# Altium PCB ACCLOGGER.PcbDoc
Units mil, origin at the board's own origin, x right, y up, seen from the top; angles counter-clockwise.
Board outline 1417.32 x 1417.32 mil, 2 copper layers (Top Layer, Bottom Layer), stack 61.2 mil thick; 73 components, 68 nets, 312 pads, 88 vias.
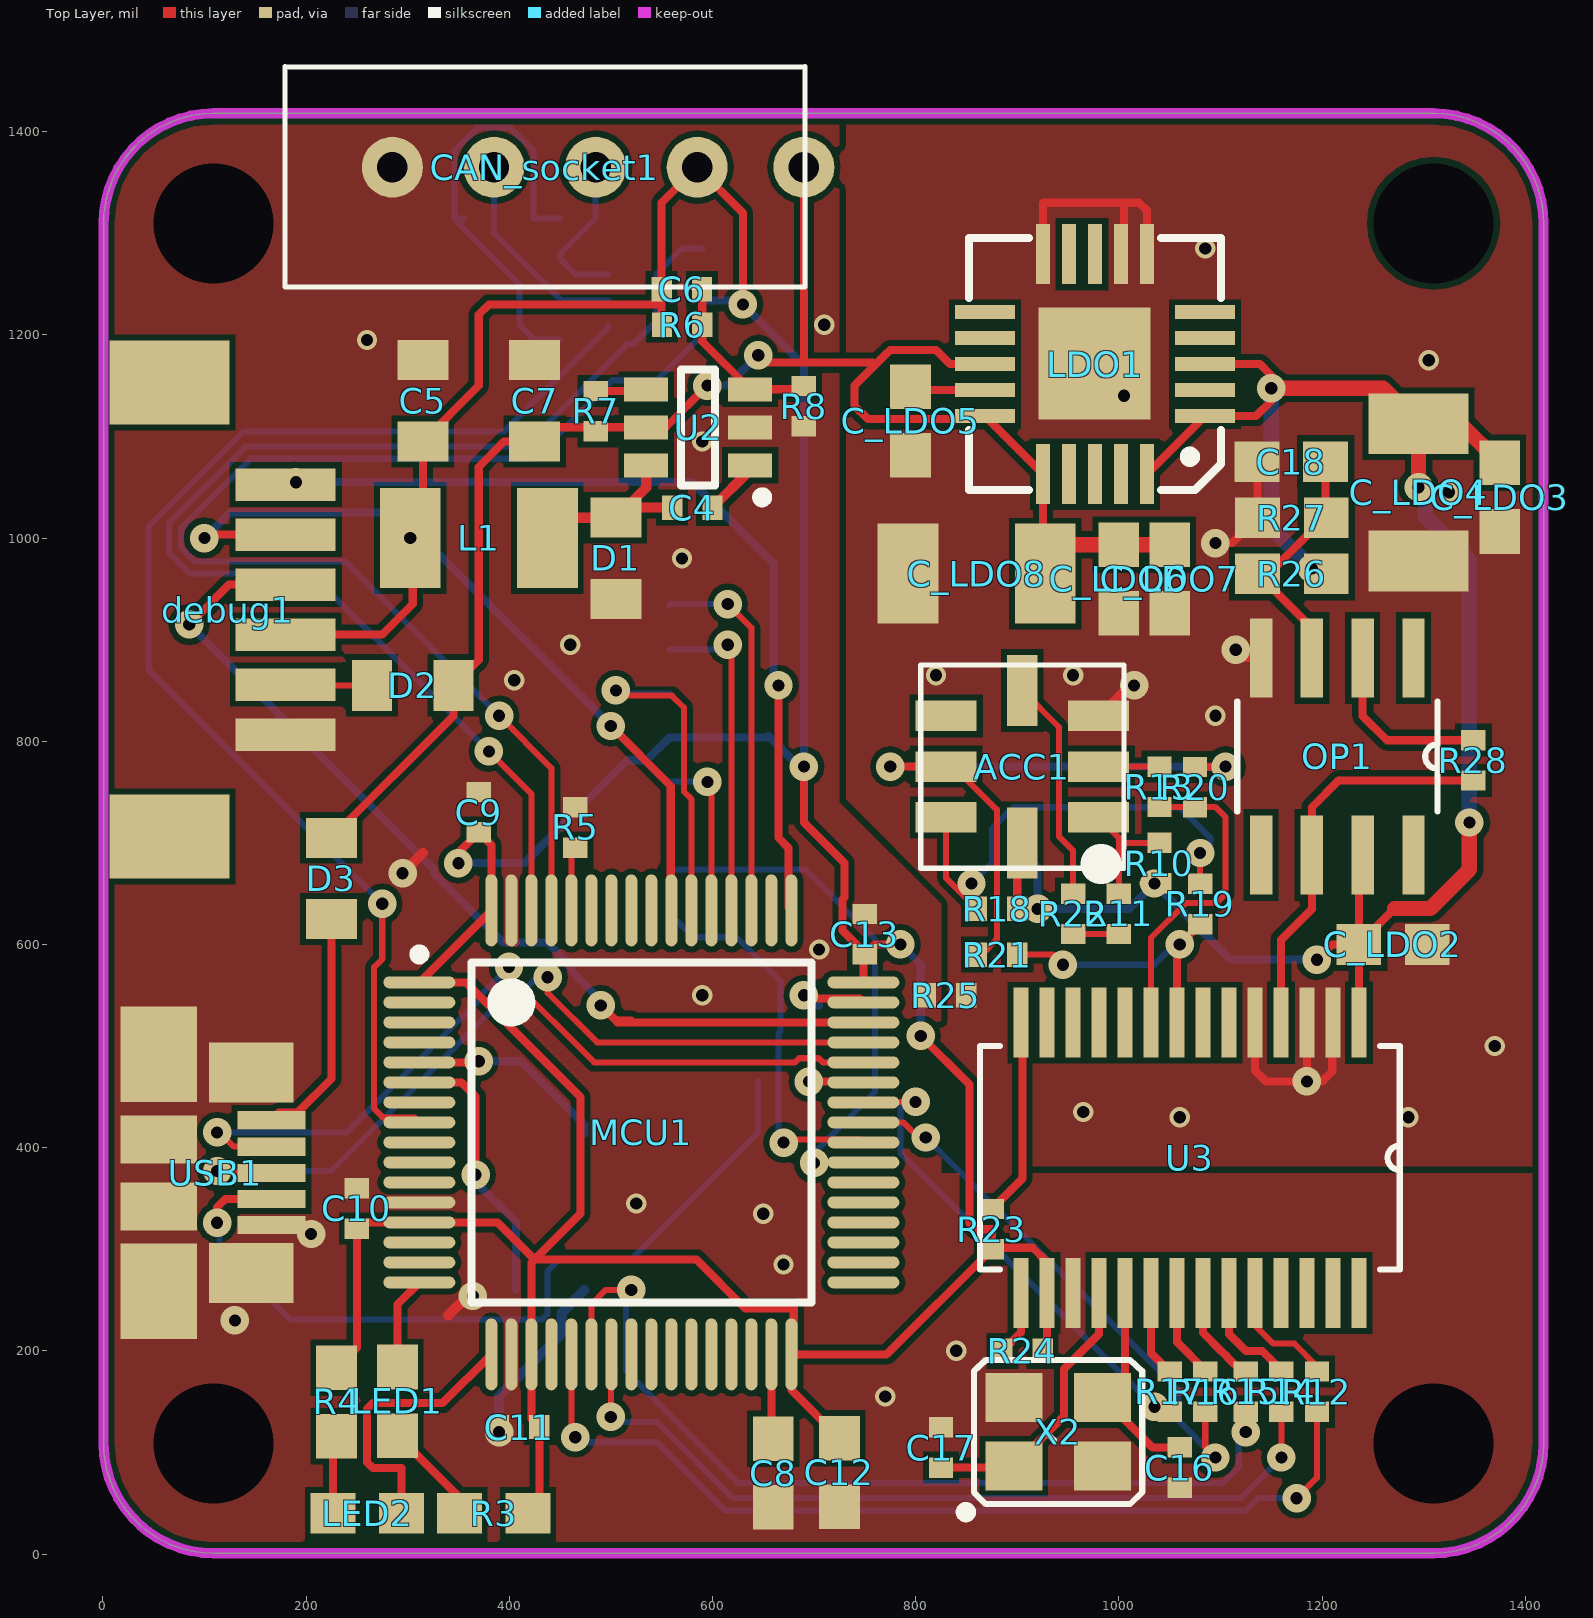
[diagram p0: Top Layer view]
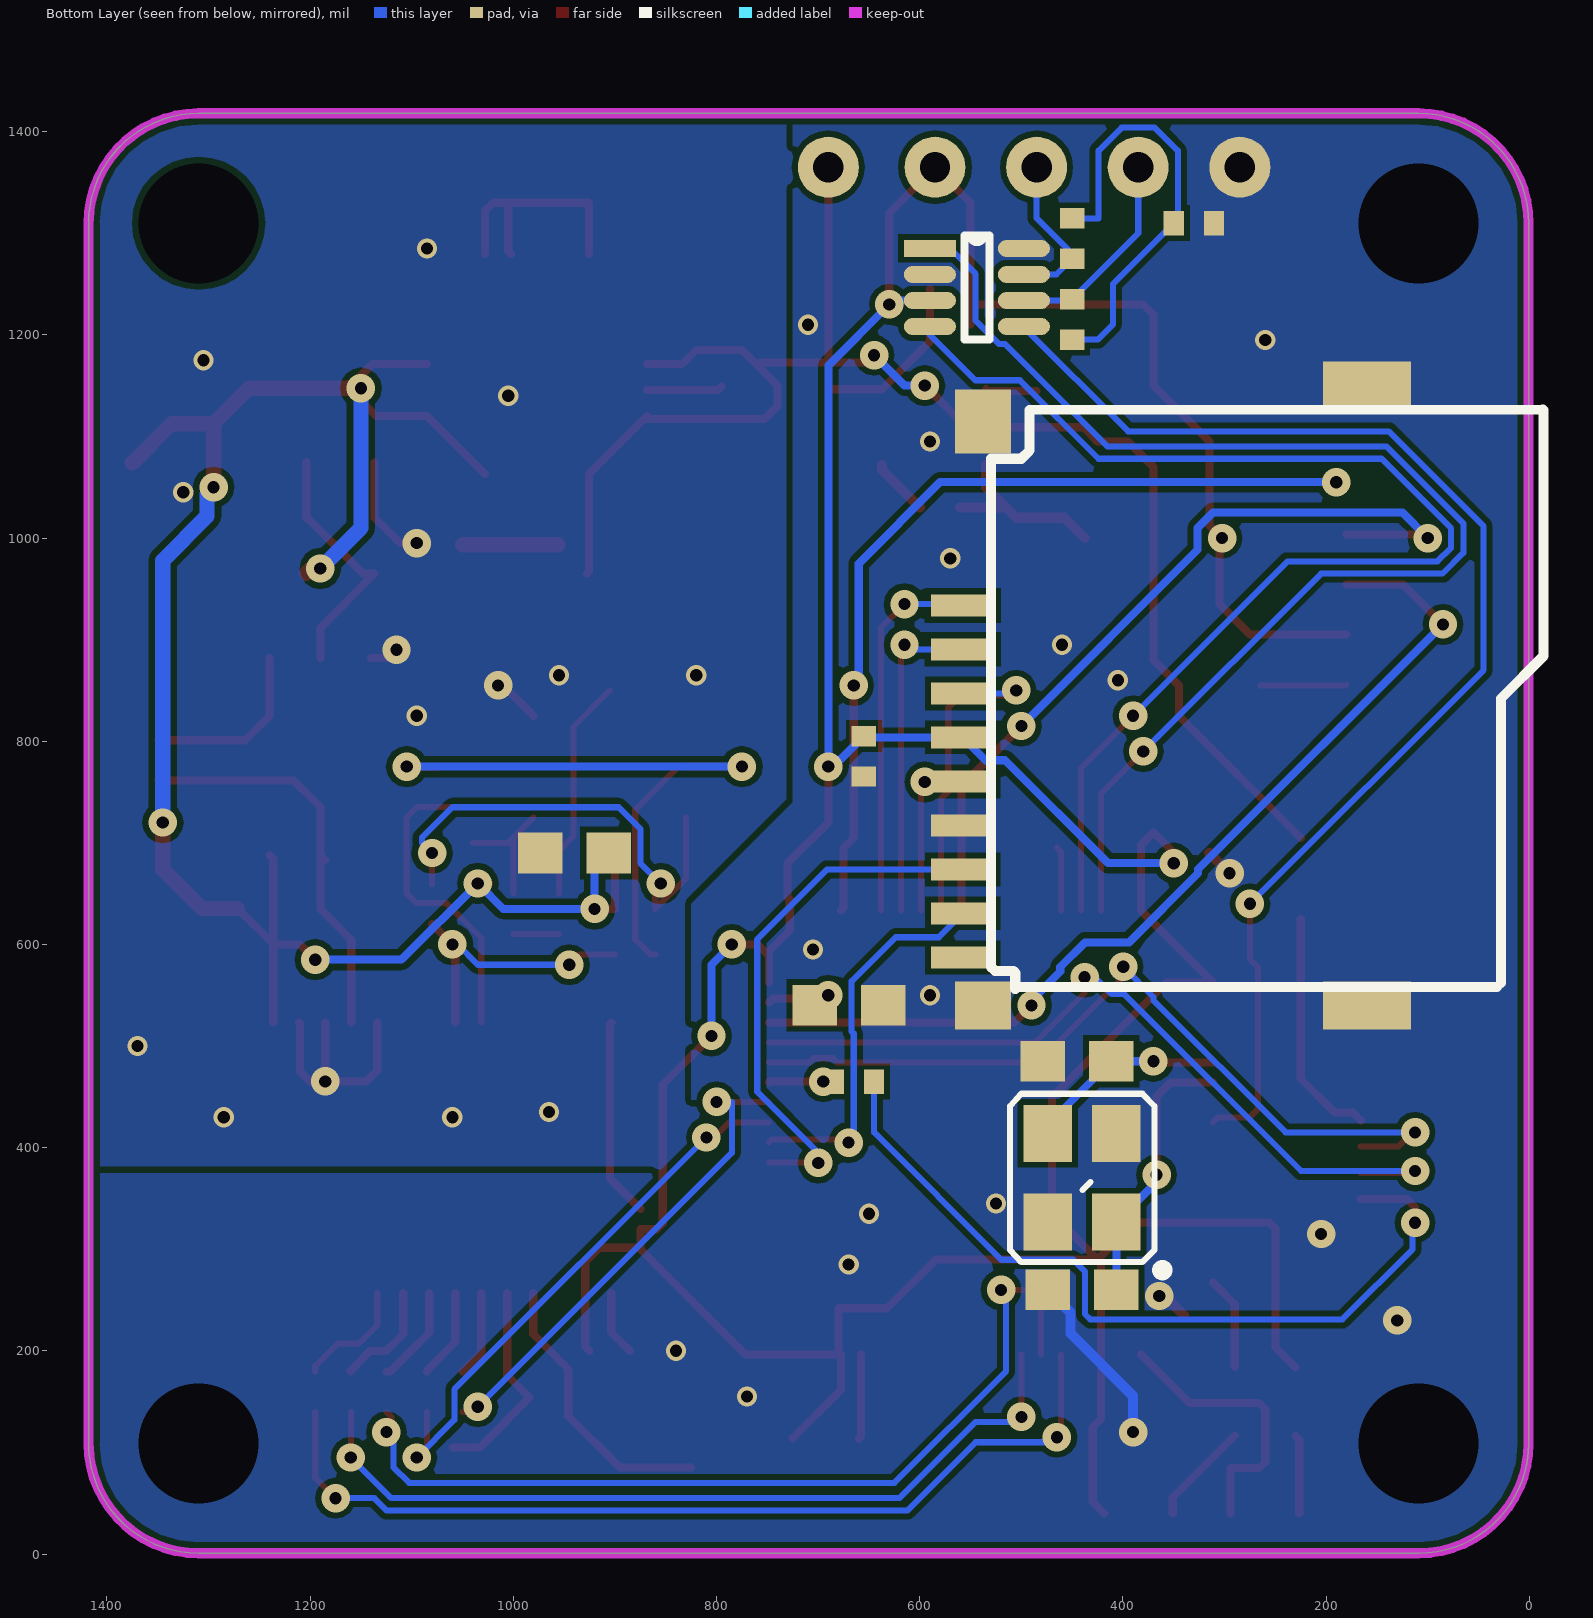
[diagram p1: Bottom Layer view, seen from below]

## Layer stack, top to bottom
Top Solder: solder mask 0.4, Solder Resist, Dk 3.5
Top Layer: signal copper 1.4
Dielectric1: core 58.4, FR-4, Dk 4.8
Bottom Layer: signal copper 1.4
Bottom Solder: solder mask 0.4, Solder Resist, Dk 3.5

## Board outline
0.73,109 ccw(c109,109) 109,0.73 1309.79,0.73 ccw(c1309.79,109) 1418.06,109 1418.06,1309.79 ccw(c1309.79,1309.79) 1309.79,1418.06 109,1418.06 ccw(c109,1309.79) 0.73,1309.79

## Design rules (kind name [scope] priority, off if disabled: settings)
AcuteAngle [All] p1: minimum=6.00000000000000E+0001 checktracksonly=FALSE
Clearance [All] p1: gap=6
ComponentClearance ComponentClearance_servo_headers [InComponent('JP1') or InComponent('JP2') or InComponent('JP3') or InComponent('JP4') or InComponent('JP5') or InComponent('JP6')] p1: gap=5 collisioncheckmode=3 verticalgap=10 showdistances=FALSE
ComponentClearance [All] p2: gap=10 collisioncheckmode=3 verticalgap=10 showdistances=FALSE
DiffPairsRouting [All] p1: maxlimit=20 minlimit=6 mostfreqgap=10 toplayer_minwidth=15 toplayer_maxwidth=15 toplayer_prefwidth=15 bottomlayer_minwidth=15 bottomlayer_maxwidth=15 bottomlayer_prefwidth=15 maxuncoupledlength=500
HoleSize [All] p1: absolutevalues=TRUE maxlimit=1000 minlimit=12 maxpercent=80.000 minpercent=20.000
MinimumAnnularRing [All] p1 off: minimumring=8
MinimumSolderMaskSliver MinimumSolderMaskSliver_FIL1-3 [InComponent('FIL1') or InComponent('FIL2') or InComponent('FIL3')] p1 off: minsoldermaskwidth=1
MinimumSolderMaskSliver [All] p2 off: minsoldermaskwidth=3
PlaneClearance [All] p1: clearance=15
PlaneConnect [All] p1: planeconnectstyle=Direct reliefexpansion=20 reliefentries=4 reliefconductorwidth=10 reliefairgap=10
PolygonConnect PolygonConnect_usb [InComponent('CONN4')] p1: connectstyle=Relief reliefconductorwidth=22 reliefentries=4 polygonreliefangle="90 Angle" airgapwidth=10
PolygonConnect [All] p2: connectstyle=Direct reliefconductorwidth=12 reliefentries=4 polygonreliefangle="90 Angle" airgapwidth=10
RoomDefinition IMU_ACC [InComponentClass('IMU_ACC')] p1 off: confinementstyle=ConfineIn formatcopy=TRUE lockcomponents=FALSE outline -2431,-1944 -431,-1944 -431,-944 -2431,-944
RoomDefinition MCU [InComponentClass('MCU')] p2 off: confinementstyle=ConfineIn formatcopy=TRUE lockcomponents=FALSE outline 1464,61 10779,61 10779,786 1464,786
RoutingVias [All] p1: holewidth=15 width=31 viastyle="Through Hole" minholewidth=12 minwidth=28 maxholewidth=28 maxwidth=50
SilkToSilkClearance SilkToSilkClearance_text [IsText] p1 off: silktosilkclearance=0
SilkToSilkClearance [All] p2 off: silktosilkclearance=4
SilkToSolderMaskClearance SilkscreenOverComponentPads [IsPad] p1 off: minsilkscreentomaskgap=2 clearancetoexposedcopper=TRUE
SolderMaskExpansion [All] p1: expansion=3
UnpouredPolygon [All] p1: allowunpoured=FALSE
Width [All] p1: maxlimit=400 minlimit=6 preferedwidth=10
21 further rules are at their usual default settings.

## Classes and differential pairs
component class MCU: C1 C2 C3 C4 C5 C6 C7 C8 C9 C10 C11 C12 C13 C14 C15 CAN_socket1 D1 D2 D3 debug1 L1 LED1 LED2 MCU1 R1 R2 R3 R4 R5 R6 R7 R8 R9 TF1 U1 U2 USB1 X1
component class IMU_ACC: ACC1 C16 C17 C18 C_LDO1 C_LDO2 C_LDO3 C_LDO4 C_LDO5 C_LDO6 C_LDO7 C_LDO8 LDO1 OP1 R10 R11 R12 R13 R14 R15 R16 R17 R18 R19 R20 R21 R22 R23 R24 R25 R26 R27 R28 U3 X2
differential pair USB: +USB_P -USB_N
differential pair CAN: +CAN_P -CAN_N

## Components (designator, comment, footprint, x,y, rotation, side; value= is the part's Value field where it differs from the comment)
ACC1 "" ADXL203 905,775 r180 top
C1 "" 0402 330,1310 r0 bottom
C2 "" 0603 445,485 r0 bottom
C3 "" 0603 440,260 r0 bottom
C4 "" 0402 580,1030 r0 top
C5 "" 0805 315,1135 r270 top
C6 "" 0402 570,1245 r180 top
C7 "" 0805 425,1135 r270 top
C8 "" 0603 660,80 r270 top
C9 "" 0402 370,730 r90 top
C10 "" 0402 250,340 r90 top
C11 "" 0402 410,125 r180 top
C12 "" 0603 725,80 r90 top
C13 "" 0402 750,610 r90 top
C14 "" 0603 670,540 r180 bottom
C15 "" 0402 655,785 r90 bottom
C16 "" 0402 1060,85 r90 top
C17 "" 0402 825,105 r270 top
C18 "" 0603 1170,1075 r180 top
C_LDO1 "" 0603 940,690 r180 bottom
C_LDO2 "" 0603 1270,600 r180 top
C_LDO3 "" 0603 1375,1040 r90 top
C_LDO4 "" 1210 1295,1045 r90 top
C_LDO5 "" 0603 795,1115 r90 top
C_LDO6 "" 0603 1000,960 r270 top
C_LDO7 "" 0603 1050,960 r270 top
C_LDO8 "" 1210 860,965 r180 top
CAN_socket1 "" 4pSocket-s 435,1365 r180 top
D1 "" 0805 505,980 r90 top
D2 "" 0805 305,855 r0 top
D3 "" 0805 225,665 r90 top
debug1 "" WFRSM125 180,905 r270 top
L1 "" 1210 370,1000 r180 top
LDO1 "" "TPS7A4700 - b" 1075,1120 r180 top
LED1 "" 0603 290,150 r90 top
LED2 "" 0603 260,40 r0 top
MCU1 "" LQFP64_N 530,415 r0 top
OP1 "" D8 1215,785 r270 top
R1 "" 0402 450,1295 r270 bottom
R2 "" 0402 450,1215 r90 bottom
R3 "" 0603 385,40 r180 top
R4 "" 0603 230,150 r270 top
R5 "" 0402 465,715 r90 top
R6 "" 0402 570,1210 r0 top
R7 "" 0402 485,1125 r270 top
R8 "" 0402 690,1130 r270 top
R9 "" 0402 665,465 r180 bottom
R10 "" 0402 1040,680 r90 top
R11 "" 0402 1000,630 r90 top
R12 "" 0402 1195,160 r270 top
R13 "" 0402 1040,755 r90 top
R14 "" 0402 1160,160 r270 top
R15 "" 0402 1125,160 r270 top
R16 "" 0402 1085,160 r270 top
R17 "" 0402 1050,160 r270 top
R18 "" 0402 880,635 r0 top
R19 "" 0402 1080,640 r270 top
R20 "" 0402 1075,755 r270 top
R21 "" 0402 880,590 r0 top
R22 "" 0402 955,630 r90 top
R23 "" 0402 875,320 r270 top
R24 "" 0402 905,200 r0 top
R25 "" 0402 830,550 r180 top
R26 "" 0603 1170,965 r0 top
R27 "" 0603 1170,1020 r0 top
R28 "" 0402 1349,781 r90 top
TF1 "" TF 160,540 r90 bottom
U1 "" SOT-8 590,1285 r180 bottom
U2 "" SOT-23-6L 586,1109 r180 top
U3 "" DB28-L 1070,390 r270 top
USB1 "" MOLEX-47346-0001 55,375 r0 top
X1 "" OSCILLATOR-3.2X2.5 440,370 r90 bottom
X2 "" OSCILLATOR-3.2X2.5 940,120 r0 top

## Footprints (in the part's own frame and the unit in brackets; to place one, negate y for a bottom-side part, rotate by r counter-clockwise, add the part's x,y. Pads: shape width x height; smd on the part's side, far side on the other; paste and mask are expansions set on the pad)
4pSocket-s [mil]
  round 60 hole 30: 1(-150,0) 2(-50,0) 3(50,0) 4(150,0)
  silkscreen extent -256,-99 256,118
0402 [mil] "0402-RES"
  rect 20x24 smd: 1(-19.68,0) 2(20,0)
0603 [mil] "0603-RES"
  rect 44x40 smd: 1(-33.46,0) 2(34,0)
0805 [mil]
  rect 39.37x50 smd: 1(-40,0) 2(40,0)
  body extent -50,-30 50,30, height 31
1210 [mm]
  rect 1.52x2.5 smd: 1(-1.715,0) 2(1.715,0)
ADXL203 [mil]
  rect 60x30 smd: 1(-75,50) 2(-75,0) 3(-75,-50) 5(75,-50) 6(75,0) 7(75,50)
  rect 30x70 smd: 4(0,-75) 8(0,75)
  silkscreen extent -100,-100 100,100, body extent -100,-100 100,100, height 80
D8 [mil]
  rect 78x22 smd: 1(-97,75) 2(-97,25) 3(-97,-25) 4(-97,-75) 5(97,-75) 6(97,-25) 7(97,25) 8(97,75)
  silkscreen extent -54,-99 54,99, body extent -118,-96 118,96, height 64
DB28-L [mil]
  rect 69x15 smd: 1(-133,166.34) 2(-133,140.75) 3(-133,115.16) 4(-133,89.57) 5(-133,63.98) 6(-133,38.39) 7(-133,12.8) 8(-133,-12.8) 9(-133,-38.39) 10(-133,-63.98) 11(-133,-89.57) 12(-133,-115.16) 13(-133,-140.75) 14(-133,-166.34) 15(133,-166.34) 16(133,-140.75) 17(133,-115.16) 18(133,-89.57) 19(133,-63.98) 20(133,-38.39) 21(133,-12.8) 22(133,12.8) 23(133,38.39) 24(133,63.98) 25(133,89.57) 26(133,115.16) 27(133,140.75) 28(133,166.34)
  silkscreen extent -110,-207 110,207
LQFP64_N [mm]
  oval 1.8x0.3 smd: 1(-5.55,3.75) 2(-5.55,3.25) 3(-5.55,2.75) 4(-5.55,2.25) 5(-5.55,1.75) 6(-5.55,1.25) 7(-5.55,0.75) 8(-5.55,0.25) 9(-5.55,-0.25) 10(-5.55,-0.75) 11(-5.55,-1.25) 12(-5.55,-1.75) 13(-5.55,-2.25) 14(-5.55,-2.75) 15(-5.55,-3.25) 16(-5.55,-3.75) 33(5.55,-3.75) 34(5.55,-3.25) 35(5.55,-2.75) 36(5.55,-2.25) 37(5.55,-1.75) 38(5.55,-1.25) 39(5.55,-0.75) 40(5.55,-0.25) 41(5.55,0.25) 42(5.55,0.75) 43(5.55,1.25) 44(5.55,1.75) 45(5.55,2.25) 46(5.55,2.75) 47(5.55,3.25) 48(5.55,3.75)
  oval 0.3x1.8 smd: 17(-3.75,-5.55) 18(-3.25,-5.55) 19(-2.75,-5.55) 20(-2.25,-5.55) 21(-1.75,-5.55) 22(-1.25,-5.55) 23(-0.75,-5.55) 24(-0.25,-5.55) 25(0.25,-5.55) 26(0.75,-5.55) 27(1.25,-5.55) 28(1.75,-5.55) 29(2.25,-5.55) 30(2.75,-5.55) 31(3.25,-5.55) 32(3.75,-5.55) 49(3.75,5.55) 50(3.25,5.55) 51(2.75,5.55) 52(2.25,5.55) 53(1.75,5.55) 54(1.25,5.55) 55(0.75,5.55) 56(0.25,5.55) 57(-0.25,5.55) 58(-0.75,5.55) 59(-1.25,5.55) 60(-1.75,5.55) 61(-2.25,5.55) 62(-2.75,5.55) 63(-3.25,5.55) 64(-3.75,5.55)
  silkscreen extent -5.67,-4.25 4.25,4.57
MOLEX-47346-0001 [mil] "MOLEX-47346-0001"
  rect 67x18 smd: 1(111,52) 2(111,26) 3(111,0) 4(111,-25.59) 5(111,-51.18)
  rect 75x94 smd: 5(0,-116.14) 5(0,117)
  rect 75x47 smd: 5(0,-32.97) 5(0,33)
  rect 83x59 smd: 5(91,-98.43) 5(91,99)
OSCILLATOR-3.2X2.5 [mil] "OSCILLATOR-3.2X2.5"
  rect 56x48 smd: 1(-43.31,-33.46) 2(44,-33.46) 3(44,34) 4(-43.31,34)
  silkscreen extent -95,-83 83,71
SOT-8 [mm]
  rect 1.3x0.42 smd: 1(0,0)
  oval 1.3x0.42 smd: 2(0,-0.65) 3(0,-1.3) 4(0,-1.95) 5(2.35,-1.95) 6(2.35,-1.3) 7(2.35,-0.65) 8(2.35,0)
  silkscreen extent 0.87,-2.28 1.48,0.33
SOT-23-6L [mm]
  rect 1.1x0.6 smd: 1(-1.3,0.95) 2(-1.3,0) 3(-1.3,-0.95) 4(1.3,-0.95) 5(1.3,0) 6(1.3,0.95)
  silkscreen extent -1.73,-1.45 0.43,1.87
TF [mm]
  rect 0.55x1.6 smd: 1(10,10.1) 2(8.9,10.1) 3(7.8,10.1) 4(6.7,10.1) 5(5.6,10.1) 6(4.5,10.1) 7(3.4,10.1) 8(2.3,10.1) 9(1.2,10.1)
  rect 1.2x2.2 smd: SHELL(0,0) SHELL(15.5,0)
  rect 1.2x1.4 smd: SHELL(0,9.6)
  rect 1.6x1.4 smd: SHELL(14.6,9.6)
  silkscreen extent 0.41,-4.42 14.9,9.4
"TPS7A4700 - b" [mm]
  rect 2.8x2.8 smd: 0(2.515,-1.321)
  rect 1.5x0.35 smd: 1(-0.25,0) 2(-0.25,-0.65) 3(-0.25,-1.3) 4(-0.25,-1.95) 5(-0.25,-2.6) 11(5.25,-2.6) 12(5.25,-1.95) 13(5.25,-1.3) 14(5.25,-0.65) 15(5.25,0)
  rect 0.35x1.5 smd: 6(1.2,-4.05) 7(1.85,-4.05) 8(2.5,-4.05) 9(3.15,-4.05) 10(3.8,-4.05) 16(3.8,1.45) 17(3.15,1.45) 18(2.5,1.45) 19(1.85,1.45) 20(1.2,1.45)
  silkscreen extent -0.65,-4.45 5.65,1.85
WFRSM125 [mm]
  rect 0.81x2.5 smd: 1(-3.75,0) 2(-2.5,0) 3(-1.25,0) 4(0,0) 5(1.25,0) 6(2.5,0)
  rect 2.1x3 smd: shell(-6.3,-2.9) shell(5.05,-2.9)
  body extent -6.79,-3.82 5.46,0.38, height 3.4

## Part data
ACC1: library part ACC-8, "Imported"
C1 C2 C3 C4 C5 C6 C7 C8 C9 C10 C11 C12 C13 C14 C15 C16 C17 C18: library part CAP0402-CAP, "电容"
C_LDO1 C_LDO2 C_LDO3 C_LDO5 C_LDO6 C_LDO7 C_LDO8: library part Cap, "Capacitor"
C_LDO4: library part Cap2, "Capacitor"
CAN_socket1: library part 4PSocket
D1 D2 D3: library part Diode, "Default Diode"
debug1: library part debug
L1: library part Inductor, "Inductor"
LDO1: library part TPS7A4700
LED1 LED2: library part LED0, "Typical INFRARED GaAs LED"
MCU1: library part STM32F103R8T6, "STM32 ARM-based 32-bit MCU with 64 Kbytes Flash, 64-pin LQFP, Industrial Temperature"
OP1: library part OP-SO8
R1 R2 R3 R4 R5 R6 R7 R8 R9: library part Res2, "电阻"
R10 R11 R12 R13 R14 R15 R16 R17 R18 R19 R20 R21 R22 R23 R24 R25 R26 R27 R28: library part Res2, "Resistor"
TF1: library part TF
U1: library part MAX3051
U2: library part MP2451
U3: library part ADS1256_DB_28, "Imported"
USB1: library part USB_Micro_TypeB, "Connector SMD USB Micro Type B middle mount"
X1 X2: library part OSCILLATOR-3.2X2.5, "Crystal Oscillator in 3.2x2.5 SMD"

## Free pads (board coordinates)
  round 0 hole 118.11 unplated: 0(109,109) 0(109,1309.79) 0(1309.79,109) 0(1309.79,1309.79)
  round 60 hole 30: 0(690,1365)

## Via types
v1: diameter 28, hole 12, Top Layer to Bottom Layer, 64 vias
v2: diameter 20, hole 12, Top Layer to Bottom Layer, 24 vias

## Nets (pads, with @x,y where several pads share a name; then routed paths per layer and width w, separated by ;. In a path a pad name is that pad's centre, name@x,y a point inside that pad or via, vN(x,y) a via of type N, cw(c..) or ccw(c..) an arc to the next point about the centre after c; other vN are vias at no path point)
3.3: C5.2 C6.2 C9.1 C10.1 C11.1 C12.2 C13.1 C15.2 CAN_socket1.1 debug1.4 L1.2 MCU1.1 MCU1.13 MCU1.19 MCU1.32 MCU1.48 MCU1.64 R3.1 R4.1 R6.1 R23.2 R24.2 TF1.4 U1.3 U3.16 | length 4525
  Top Layer w8: debug1.4 275,905 305,935 305,997.48 v1(302.48,1000) 315,1012.52 C5.2 370,1150 370,1220 380,1230 550,1230 ; R4.1 250,203.46 C10.1 256.1,326.42 MCU1.13 388.58,326.42 425,290 ; v1(350,680) 350,690.32 C9.1 382.36,697.95 MCU1.64 MCU1.1 357.36,562.64 470,450 470,335 425,290 ; R3.1 429.68,51.22 C11.1 421.73,132.95 MCU1.19 421.73,286.73 425,290 ; R6.1 550,1210.32 550,1230 ; v1(630,1230) 630,1320 CAN_socket1.1 550,1330 C6.2 550,1230 ; v1(690,775) 690,720 730,680 730,646.14 728,644.14 728,613.86 750,591.86 C13.1 ; C12.2 677.64,161.36 MCU1.32 ; MCU1.48 748.5,588.82 C13.1 ; v1(785,600) 759.68,600 C13.1 ; v1(805,510) 853,462 853,325.54 858.86,319.68 875,319.68 R23.2 ; R24.2 929.25,204.25 U3.16 929.25,287.55 915.3,301.5 876.5,301.5 R23.2 ; 425,290 584.13,290 632.2,241.93 680,241.93 680,198.86 MCU1.32 ; MCU1.32 771.5,196.5 R23.2
  Bottom Layer w8: v1(350,680) 414.84,680 516.14,781.3 535.16,781.3 TF1.4 653.78,803.78 C15.2 685,775 v1(690,775) 690,1170 v1(630,1230) 626.18,1233.82 U1.3 ; v1(785,600) 805,580 v1(805,510)
5V: ACC1.8 C_LDO1.2 C_LDO2.2 C_LDO3.2 C_LDO4.2 LDO1.1 LDO1.3 LDO1.20 OP1.7 R10.1 R18.2 R26.2 U3.1 | length 2108.2
  Top Layer w8: ACC1.8 900,695 R18.2 v1(920,635) ; LDO1.20 LDO1.1 1135,1120 1150,1135 v1(1150,1147.5) 1150,1160 1138.82,1171.18 LDO1.3 ; v1(1035,660) 1024,660 1024,660.32 R10.1 ; v1(1195,585) 1210,600 C_LDO2.2 C_LDO2.2@1236.34,600.34 ; U3.1 C_LDO2.2@1236.34,600.34 ; OP1.7 1236.34,684.34 C_LDO2.2@1236.34,600.34 ; 1345,678.86 1305.14,639 1275,639 1271.5,635.5 C_LDO2.2@1236.34,600.34
  Top Layer w15: v1(1150,1147.5) 1260.02,1147.5 C_LDO4.2 ; v1(1190,970) 1199,970 R26.2 ; 1271.5,635.5 1306.59,635.5 1345,673.91 1345,678.86 v1(1345,720) ; v1(1295,1050) C_LDO4.2 ; C_LDO3.2 1336.48,1112.52 C_LDO4.2
  Bottom Layer w8: C_LDO1.2 920,676 v1(920,635) 1010,635 v1(1035,660) 1110,585 v1(1195,585)
  Bottom Layer w15: v1(1150,1147.5) 1150,1010 v1(1190,970) ; v1(1295,1050) 1301.5,1043.5 1301.5,1021.5 1345,978 v1(1345,720)
AGND: ACC1.3 C18.2 C_LDO1.1 C_LDO2.1 C_LDO3.1 C_LDO4.1 C_LDO5.1 C_LDO6.2 C_LDO7.2 C_LDO8.2 LDO1.0 LDO1.6 LDO1.7 LDO1.10 OP1.4 R25.1 R27.1 U3.2 U3.3 U3.5 | length 670.8
  Top Layer w8: LDO1.10 925.39,1330 1005,1330 ; ACC1.3 984.61,829.61 1010,855 v1(1015,855) ; LDO1.7 1005,1282.28 1005,1330 ; LDO1.6 1027.76,1322.24 1020,1330 1005,1330 ; v1(1095,995) 1111.54,995 1132.09,1015.55 R27.1 C18.2@1136.54,1074.46 ; v1(1115,890) 1123,882 OP1.4 ; U3.5 1133.98,476.02 1145,465 v1@1185,465 ; U3.3 v1(1185.16,465.16) v1@1185,465 ; U3.2 1210,522.25 1210,475 1200,465 v1@1185,465
  other v2: 1060,430 1285,430 965,435 1370,500 1095,825 820,865 955,865 1325,1045 1005,1140 1305,1175 1085,1285
AX: R19.2 R21.2 U3.8 | length 278.9
  Top Layer w6: R21.2 935,590 v1(945,580)
  Top Layer w8: U3.8 1057.2,597.2 v1(1060,600) R19.2
  Bottom Layer w6: v1(945,580) 1035,580 1055,600 v1(1060,600)
AY: R13.1 R20.2 U3.9 | length 319.6
  Top Layer w6: U3.9 1031.61,606.34 1065.96,640.68 1095.73,640.68 1105,649.96 1105,725 1094.68,735.32 R20.2@1074.68,735.32 ; R13.1 R20.2@1074.68,735.32 ; R20.2 R20.2@1074.68,735.32
CAN_N: CAN_socket1.3 R2.2 U1.6 | length 204.9
  Bottom Layer w6: CAN_socket1.3 385,1300 R2.2 451.18,1233.82 U1.6
CAN_P: CAN_socket1.2 R1.2 U1.7 | length 158.4
  Bottom Layer w6: CAN_socket1.2 485,1314.96 450,1279.96 R1.2 465.59,1259.41 U1.7
GND: C1.1 C2.2 C3.2 C5.1 C7.1 C8.2 C9.2 C10.2 C11.2 C12.1 C13.2 C14.2 C15.1 C16.1 C17.1 CAN_socket1.4 D1.1 debug1.6 MCU1.12 MCU1.18 MCU1.63 pad.0@109,109 pad.0@109,1309.79 pad.0@1309.79,109 R5.2 R8.2 R25.2 TF1.6 TF1.SHELL U1.2 U1.8 U2.2 U3.17 USB1.5 X1.2 X1.4 X2.2 X2.4 | length 235.2
  Top Layer w10: v1(295,670) 315,690 ; 340,235 359,254 v1(364.3,254)
  Bottom Layer w10: v1(390,120) 390,155.46 451.54,217 451.54,237.54 C3.2
  other v1: 130,230 205,315
  other v2: 770,155 840,200 670,285 650,335 525,345 590,550 705,595 405,860 460,895 570,980 590,1095 260,1195 710,1210
NetACC1_1: ACC1.1 R10.2 R11.2 | length 125.4
  Top Layer w6: ACC1.1 1000,705 ; R11.2 1000,705 ; R10.2 1005,700 1000,705
NetACC1_2: ACC1.2 R13.2 | length 60
  Top Layer w6: ACC1.2 R13.2
NetACC1_4: ACC1.4 R22.2 | length 220.7
  Top Layer w6: ACC1.4 941,814 941,706.27 955,692.27 R22.2
NetACC1_6: ACC1.6 R20.1 R21.1 | length 636.3
  Top Layer w6: ACC1.6 837.73,775 880,732.73 880,605 865,590 R21.1
  Top Layer w8: v1(775,775) ACC1.6 ; R20.1 1104.68,774.68 v1(1105,775)
  Bottom Layer w8: v1(775,775) v1(1105,775)
NetACC1_7: ACC1.7 R18.1 R19.1 | length 477.5
  Top Layer w6: ACC1.7 830,665.32 R18.1 860.32,654.68 v1(855,660) ; R19.1 v1(1080,690)
  Bottom Layer w6: v1(855,660) 875,680 875,713.73 896.27,735 1060,735 1090,705 1090,700 v1(1080,690)
NetC1_2: C1.2 R1.1 R2.1 | length 442.1
  Bottom Layer w6: R2.1 424.68,1195.32 410,1210 410,1250 C1.2 354.68,1314.68 346,1314.68 346,1381.15 368.85,1404 401.15,1404 424,1381.15 424,1314.68 R1.1
NetC2_1: C2.1 MCU1.5 X1.3 | length 197.4
  Top Layer w8: MCU1.5 368.9,483.9 v1(370,485)
  Bottom Layer w8: v1(370,485) C2.1 474,422.54 X1.3
NetC3_1: C3.1 MCU1.6 X1.1 | length 273.4
  Top Layer w8: MCU1.6 353.16,464.21 366.93,450.45 v1(366.93,373.32)
  Bottom Layer w8: v1(366.93,373.32) 365,375.25 365,368.23 X1.1 C3.1
NetC4_1: C4.1 D1.2 L1.1 U2.6 | length 185
  Top Layer w10: L1.1 457.52,1020 D1.2 D1.2@515,1030 ; U2.6 534.82,1049.82 D1.2@515,1030 ; C4.1 D1.2@515,1030
NetC4_2: C4.2 U2.1 | length 57
  Top Layer w10: C4.2 637.18,1067.18 U2.1
NetC6_1: C6.1 R6.2 R8.1 U2.3 | length 172.5
  Top Layer w8: C6.1 590,1244.68 R6.2 590,1193.58 U2.3 686.71,1146.4 R8.1
NetC8_1: C8.1 MCU1.31 | length 83.9
  Top Layer w8: MCU1.31 657.95,115.51 C8.1
NetC14_1: C14.1 MCU1.47 | length 82.1
  Top Layer w8: v1(690,550) 693.27,546.73 744.72,546.73 MCU1.47
  Bottom Layer w8: v1(690,550) 695,550 705,540 C14.1
NetC16_2: C16.2 U3.19 X2.3 | length 208.4
  Top Layer w8: U3.19 1006.02,176.02 X2.3 1033,105 C16.2
NetC17_2: C17.2 U3.18 X2.1 | length 277.5
  Top Layer w8: C17.2 895.16,85 X2.1 946,135.84 946,182.14 980.43,216.58 U3.18
NetC18_1: C18.1 OP1.3 R26.1 R27.2 | length 250.3
  Top Layer w8: OP1.3 1190,911.54 R26.1 1147.93,965 1172,989.07 1172,989.14 1177.86,995 1177.93,995 R27.2@1203.46,1020.54 ; C18.1 R27.2@1203.46,1020.54 ; R27.2 R27.2@1203.46,1020.54
NetC_LDO5_2: C_LDO5.2 LDO1.14 | length 74.7
  Top Layer w8: C_LDO5.2 798.41,1145.59 LDO1.14
NetD2_1: D2.1 debug1.5 | length 85.3
  Top Layer w6: debug1.5 180.79,855 D2.1
NetD3_1: D3.1 USB1.1 | length 233.1
  Top Layer w8: USB1.1 173.5,434.5 191.64,434.5 225,467.86 D3.1
Netdebug1_1: debug1.1 MCU1.49 | length 862.9
  Top Layer w8: debug1.1 187.64,1052.64 v1(190,1055) ; v1(665,855) 665,705 675,695 675,636.14 MCU1.49
  Bottom Layer w8: v1(190,1055) 580,1055 660,975 660,860 v1(665,855)
Netdebug1_2: debug1.2 MCU1.55 | length 797.5
  Top Layer w8: v1(100,1000) 103.43,1003.43 debug1.2 ; v1(500,815) 559,756 559,634.03 MCU1.55
  Bottom Layer w8: v1(100,1000) 125,1025 311.42,1025 326.48,1009.94 326.48,988.52 v1(500,815)
Netdebug1_3: debug1.3 MCU1.46 | length 967
  Top Layer w8: v1(85,915) 124.21,954.21 debug1.3 ; v1(490,540) 505,525 ; 520,525 505,525 ; MCU1.46 506.73,523.27 505,525
  Bottom Layer w8: v1(85,915) 326,674 326,670.06 393.99,602.07 437.43,602.07 461.78,577.72 461.78,573.22 495,540 v1(490,540)
NetLED1_1: LED1.1 R3.2 | length 101.8
  Top Layer w8: LED1.1 351,55.54 R3.2
NetLED1_2: LED1.2 MCU1.16 | length 92.3
  Top Layer w8: LED1.2 290,245.87 MCU1.16
NetLED2_1: LED2.1 R4.2 | length 77.4
  Top Layer w8: LED2.1 226.54,112.54 R4.2
NetLED2_2: LED2.2 MCU1.17 | length 277.9
  Top Layer w8: LED2.2 294,84.54 265.86,84.54 260,90.39 260,142.68 265.86,148.54 334.4,148.54 MCU1.17
NetMCU1_8: MCU1.8 U1.5 | length 1256.1
  Top Layer w6: v1(275,640) 275,585.48 267.06,577.54 267.06,438.35 275.79,429.62 306.72,429.62 MCU1.8
  Bottom Layer w6: v1(275,640) 45,870 45,1011.47 138.53,1105 395,1105 497.48,1207.48 U1.5
NetMCU1_14: MCU1.14
NetMCU1_21: MCU1.21 R12.2 | length 921.2
  Top Layer w6: MCU1.21 461.1,118.9 v1(465,115) ; v1(1175,55) 1195,75 R12.2
  Bottom Layer w6: v1(465,115) 470,110 545,110 612,43 1124.97,43 1136.97,55 v1(1175,55)
NetMCU1_22: MCU1.22 R15.2 | length 893.7
  Top Layer w6: MCU1.22 480.79,244.21 480,245 495,260 v1(520,260) ; v1(1125,120) 1120,125 1120,135 R15.2
  Bottom Layer w6: v1(520,260) 515,255 515,180 625,70 1102.53,70 1118,85.47 1118,113 v1(1125,120)
NetMCU1_23: MCU1.23 R14.2 | length 816.4
  Top Layer w6: v1(500,135) 500,196.02 MCU1.23 ; v1(1160,95) R14.2
  Bottom Layer w6: v1(500,135) 505,130 545,130 620,55 1120,55 v1(1160,95)
NetMCU1_39: MCU1.39 TF1.7 | length 524.4
  Top Layer w6: v1(700,385) 700.47,385.47 MCU1.39
  Bottom Layer w6: TF1.7 691.14,673.86 760,605 760,455 700,395 v1(700,385)
NetMCU1_40: MCU1.40 TF1.8 | length 377.5
  Top Layer w6: v1(670,405) 673,408 745.66,408 MCU1.40
  Bottom Layer w6: TF1.8 581.12,607.07 623.66,607.07 667,563.73 667,514.27 665,512.27 v1@665,405
NetMCU1_41: MCU1.41 R16.2 | length 549.8
  Top Layer w6: MCU1.41 787.63,424.84 802.47,410 v1(810,410) ; R16.2 1085,105 v1(1095,95)
  Bottom Layer w6: v1(810,410) 1058,162 1058,132 v1(1095,95)
NetMCU1_42: MCU1.42 R17.2 | length 490.2
  Top Layer w6: MCU1.42 748.98,445 v1(800,445) ; v1(1035,145) 1035,140 R17.2
  Bottom Layer w6: v1(800,445) 785,445 785,395 v1(1035,145)
NetMCU1_43: MCU1.43 R9.1 | length 64.1
  Top Layer w8: v1(695,465) 747.72,465 MCU1.43
  Bottom Layer w8: R9.1 v1(695,465)
NetMCU1_51: MCU1.51 TF1.1 | length 369
  Top Layer w6: v1(615,935) 638.27,911.73 MCU1.51
  Bottom Layer w6: TF1.1 558.94,935 v1(615,935)
NetMCU1_52: MCU1.52 TF1.2 | length 322.2
  Top Layer w6: v1(615,895) 618.58,891.42 MCU1.52
  Bottom Layer w6: TF1.2 610.39,890.39 v1(615,895)
NetMCU1_53: MCU1.53 TF1.5 | length 165.7
  Top Layer w6: v1(595,760) 598.9,756.1 MCU1.53
  Bottom Layer w6: TF1.5 594.53,760.47 v1(595,760)
NetMCU1_54: MCU1.54 TF1.3 | length 330.4
  Top Layer w6: v1(505,850) 510,845 560,845 572,833 572,750.47 579.21,743.26 MCU1.54
  Bottom Layer w6: v1(505,850) 507.91,847.09 TF1.3
NetMCU1_58: MCU1.58
NetMCU1_59: MCU1.59
NetMCU1_60: MCU1.60 R5.1 | length 63.4
  Top Layer w6: MCU1.60 461.1,691.42 R5.1
NetMCU1_61: MCU1.61 U1.4 | length 1213.5
  Top Layer w6: v1(390,825) 441.42,773.58 MCU1.61
  Bottom Layer w6: v1(390,825) 238,977 90.47,977 77,990.47 77,1009.53 145.47,1078 424.09,1078 501.39,1155.3 545.3,1155.3 590,1200 U1.4
NetMCU1_62: MCU1.62 U1.1 | length 1262.7
  Top Layer w6: v1(380,790) 421.73,748.27 MCU1.62
  Bottom Layer w6: v1(380,790) 205,965 85.5,965 65,985.5 65,1014.5 140.5,1090 415,1090 515.96,1190.96 521.96,1190.96 545,1214 545,1260 570,1285 U1.1
NetOP1_2: OP1.2 R28.2 | length 175.9
  Top Layer w8: OP1.2 1240,825 1264,801 R28.2
NetR7_1: R7.1 U2.4 | length 50.5
  Top Layer w8: R7.1 533.1,1144.68 U2.4
NetR9_2: R9.2 USB1.4 | length 808.6
  Top Layer w8: v1(112.5,326.07) 112.5,341.32 115,343.82 120.59,349.41 USB1.4
  Bottom Layer w6: v1(112.5,326.07) 115,323.57 115,300 184,231 432.26,231 437.54,236.27 437.54,278.26 448.96,289.69 519.69,289.69 645,415 R9.2
NetR12_1: R12.1 U3.24 | length 114.8
  Top Layer w6: U3.24 1133.98,225.24 1152.11,207.11 1172.89,207.11 1195,185 R12.1
NetR14_1: R14.1 U3.23 | length 108
  Top Layer w8: U3.23 1108.39,216.61 1125.32,199.68 1141.14,199.68 1160,180.83 R14.1
NetR15_1: R15.1 U3.22 | length 97.3
  Top Layer w8: U3.22 1082.8,217.83 1100.63,200 1100.83,200 1107,193.83 1107,193.63 1120.94,179.68 R15.1
NetR16_1: R16.1 U3.21 | length 88.8
  Top Layer w8: U3.21 1057.2,208.62 1085,180.83 R16.1
NetR17_1: R17.1 U3.20 | length 84.9
  Top Layer w8: U3.20 1031.61,198.07 R17.1
NetR23_1: R23.1 U3.14 | length 196.3
  Top Layer w8: R23.1 905,369.68 905,521.66 U3.14
NetR24_1: R24.1 U3.15 | length 64.6
  Top Layer w8: R24.1 903.66,218.35 U3.15
REFP: OP1.6 R28.1 U3.4 | length 401.4
  Top Layer w8: U3.4 1159.57,604.57 1190,635 OP1.6 ; OP1.6@1185.16,683.16 OP1.6 ; R28.1 1216.32,761.32 1190,735 OP1.6
ST: R11.1 R22.1 | length 45
  Top Layer w6: R22.1 R11.1
USB_N: MCU1.44 USB1.2 | length 813.3
  Top Layer w6: v1(112.5,415) 115,415 129,401 USB1.2 ; v1(399.78,578.07) 399.78,567.59 483.47,483.9 681.37,483.9 685.47,488 704.53,488 708.63,483.9 MCU1.44
  Bottom Layer w6: v1(112.5,415) 240,415 370,545 370,548.29 v1(399.78,578.07)
USB_P: MCU1.45 USB1.3 | length 805.1
  Top Layer w6: v1(112.5,377) 114.5,375 USB1.3 ; v1(437.78,567.78) 437.78,552.22 486.42,503.58 MCU1.45
  Bottom Layer w6: v1(112.5,377) 224.63,377 398.7,551.07 410.96,551.07 427.67,567.78 v1(437.78,567.78)
VMCU: C7.2 C_LDO6.1 C_LDO7.1 C_LDO8.1 D2.2 D3.2 LDO1.13 LDO1.15 LDO1.16 pad.0@690,1365 R7.2 U2.5 | length 1632.5
  Top Layer w8: D3.2 345,825 D2.2 370,880 370,1070 395,1095 C7.2 439,1109 U2.5 554,1109 v1(595,1150) ; v1(645,1180) 652.4,1172.6 690,1172.6 ; pad.0@690,1365 690,1172.6 ; 757.54,1172.6 690,1172.6 ; LDO1.13 833.82,1171.18 820,1185 775,1185 771,1181 770.86,1181 740,1150.14 740,1130 753,1117 868.31,1117 LDO1.15 LDO1.16 925.39,967.13 C_LDO8.1
  Top Layer w15: C_LDO8.1@955.98,993.46 C_LDO6.1 C_LDO7.1
  Bottom Layer w8: v1(595,1150) 615,1150 v1(645,1180)
pads on no net: ACC1.5 debug1.shell LDO1.2 LDO1.4 LDO1.5 LDO1.8 LDO1.9 LDO1.11 LDO1.12 LDO1.17 LDO1.18 LDO1.19 MCU1.2 MCU1.3 MCU1.4 MCU1.7 MCU1.9 MCU1.10 MCU1.11 MCU1.15 MCU1.20 MCU1.24 MCU1.25 MCU1.26 MCU1.27 MCU1.28 MCU1.29 MCU1.30 MCU1.33 MCU1.34 MCU1.35 MCU1.36 MCU1.37 MCU1.38 MCU1.50 MCU1.56 MCU1.57 OP1.1 OP1.5 OP1.8 TF1.9 U3.6 U3.7 U3.10 U3.11 U3.12 U3.13 U3.25 U3.26 U3.27 U3.28

## Polygon pours and split planes (outlines as drawn)
GND on Bottom Layer "Top Layer-No Net" (solid, remove dead copper, pour order 6): -90,1555 -60,1525 -60,-200 1610,-200 1615,-205 1575,-165 1575,375 825,375 825,600 825,640 725,740 725,1605
AGND on Bottom Layer "Top Layer-No Net" (solid, remove dead copper, pour order 7): 695,1505 695,280 1580,280 1580,1440 1550,1470
GND on Top Layer "Top Layer-No Net" (solid, remove dead copper, pour order 5): -90,1555 -60,1525 -60,-200 1610,-200 1615,-205 1575,-165 1575,375 825,375 825,600 825,640 725,740 725,1605
AGND on Top Layer "Top Layer-No Net" (solid, remove dead copper, pour order 8): 645,1525 680,1490 680,310 1430,310 1455,335 1525,405 1525,1525

## Keep-outs
Keep-Out Layer:
  the board outline again, w10

## Silkscreen, mask and mechanical layers (free items; w line width, h text height)
Mechanical 1:
  the board outline again, w10

## Dimensions
0.73,-18.95 to 1418.06,-28.79 on Dimensions
109,-18.95 to 1309.79,-18.95 on Dimensions
-18.95,109 to -18.95,1309.79 on Dimensions
-18.95,0.73 to -18.95,1418.06 on Dimensions

## Text inside footprints (layer, text, board x,y; h text height)
U2: Mechanical 15 "1" at 568.28,1115.47 h29.53 r270
U3: Mechanical 1 "*" at 1296.34,533 h50 r270